# Altium PCB PX4FLOW2.0_X0.PcbDoc (part 1 of 2)
Units mm, origin at the board's own origin, x right, y up, seen from the top; angles counter-clockwise.
Board outline 45.39 x 35 mm, 6 copper layers (Top, Signal Layer 1, Signal Layer 2, Route2, Route15, Bottom), stack 1.474 mm thick; 104 components, 102 nets, 463 pads, 304 vias.
Unrouted connection lines stored in the file: 8.
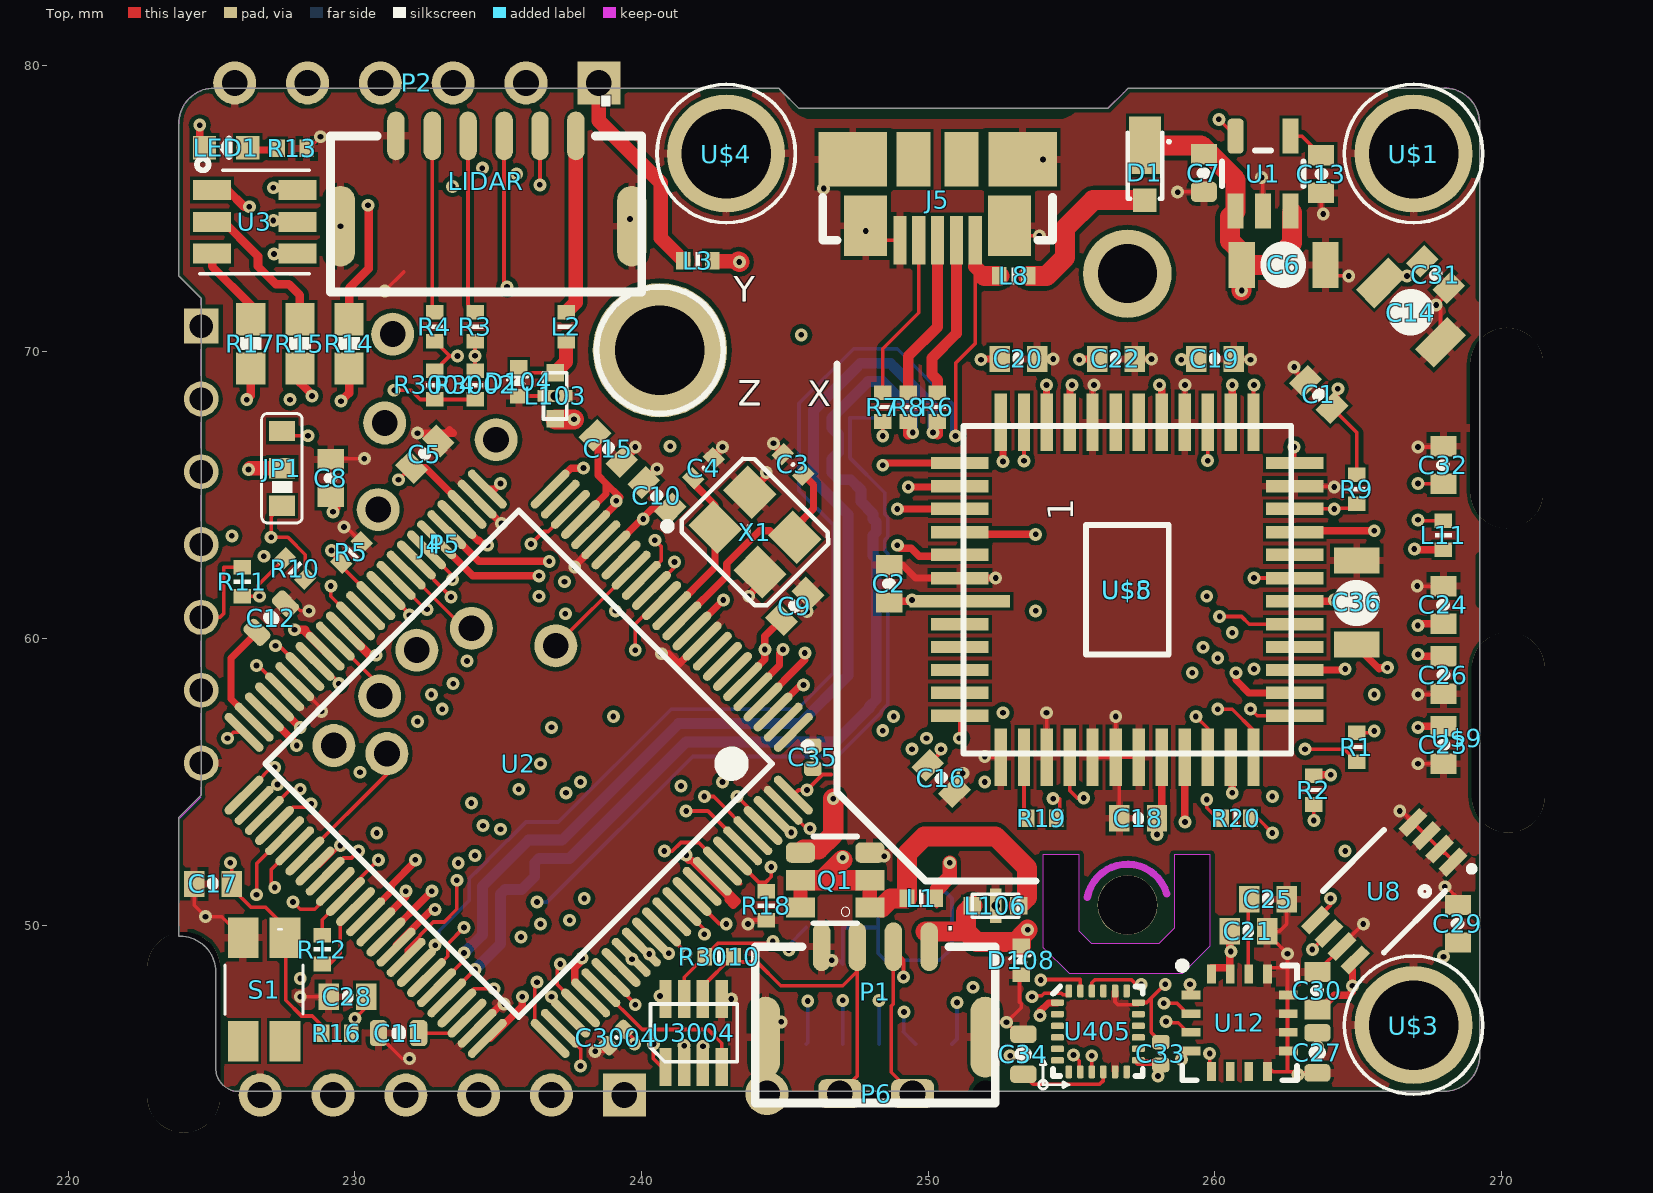
[diagram p0: Top view]
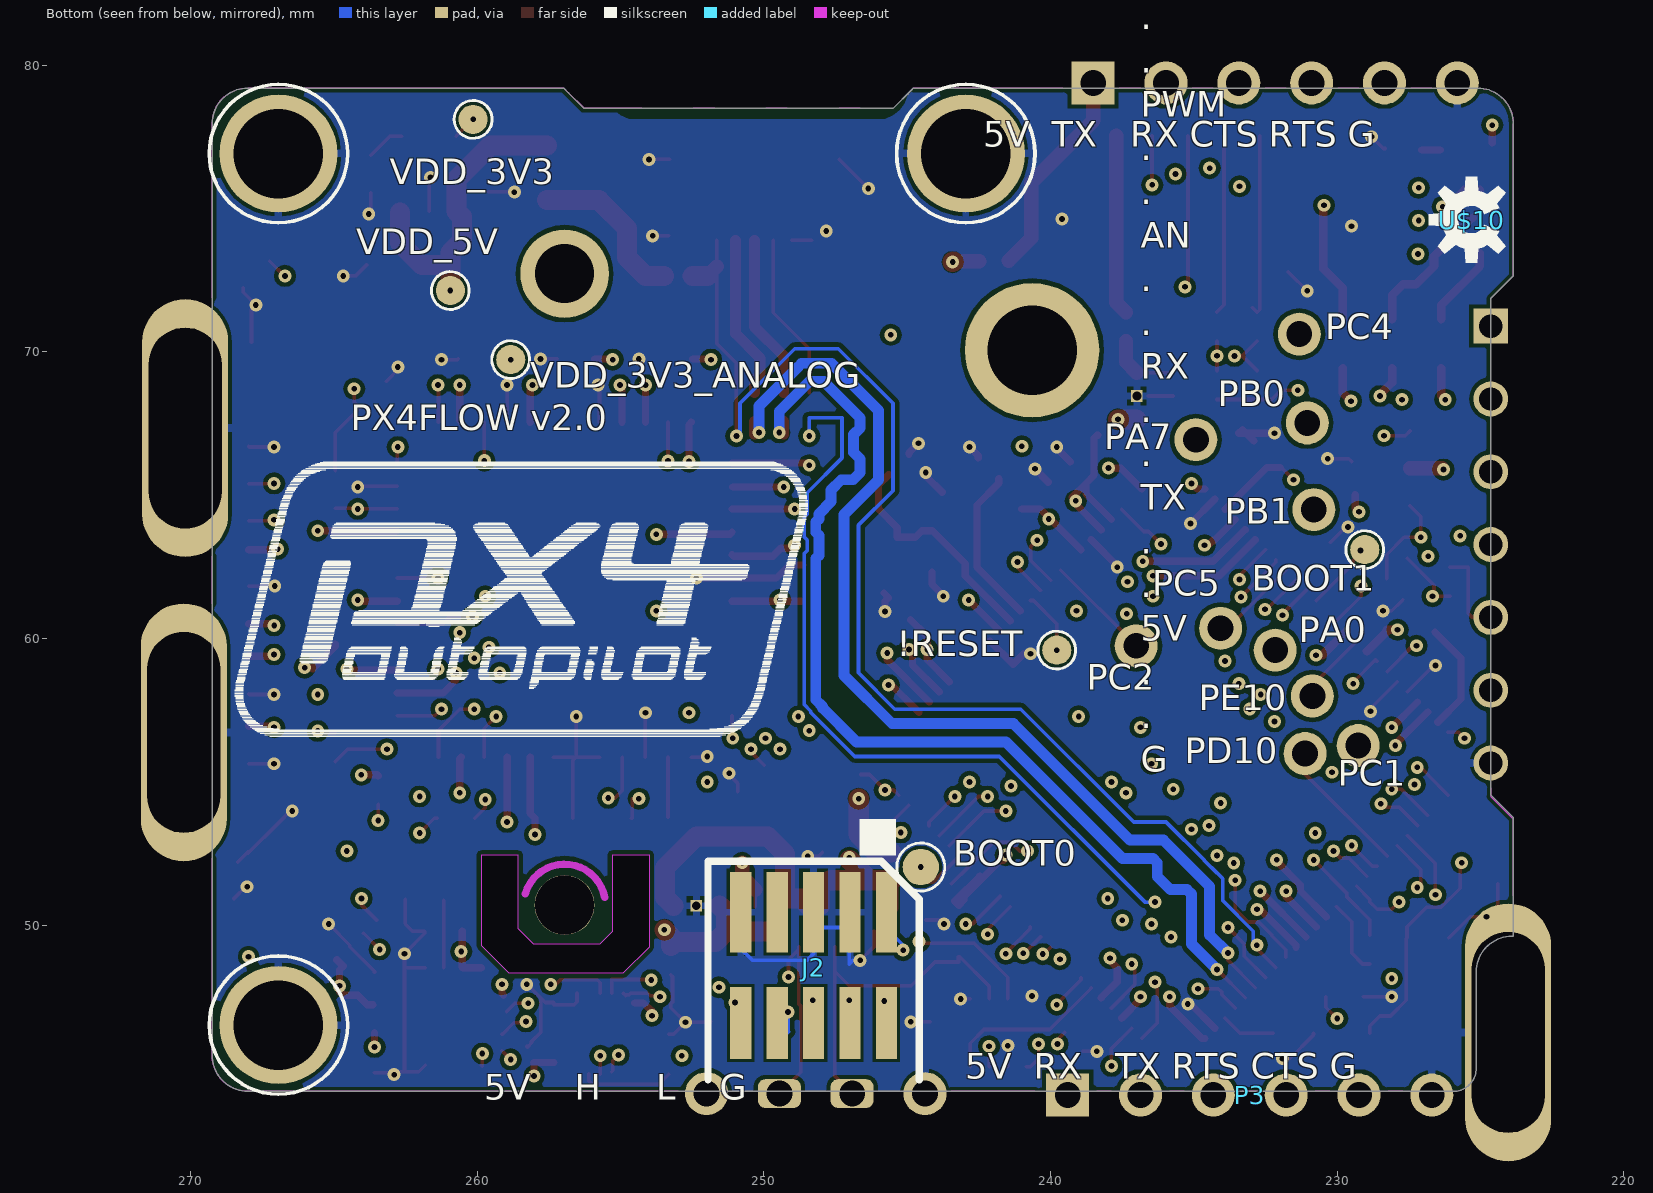
[diagram p1: Bottom view, seen from below]
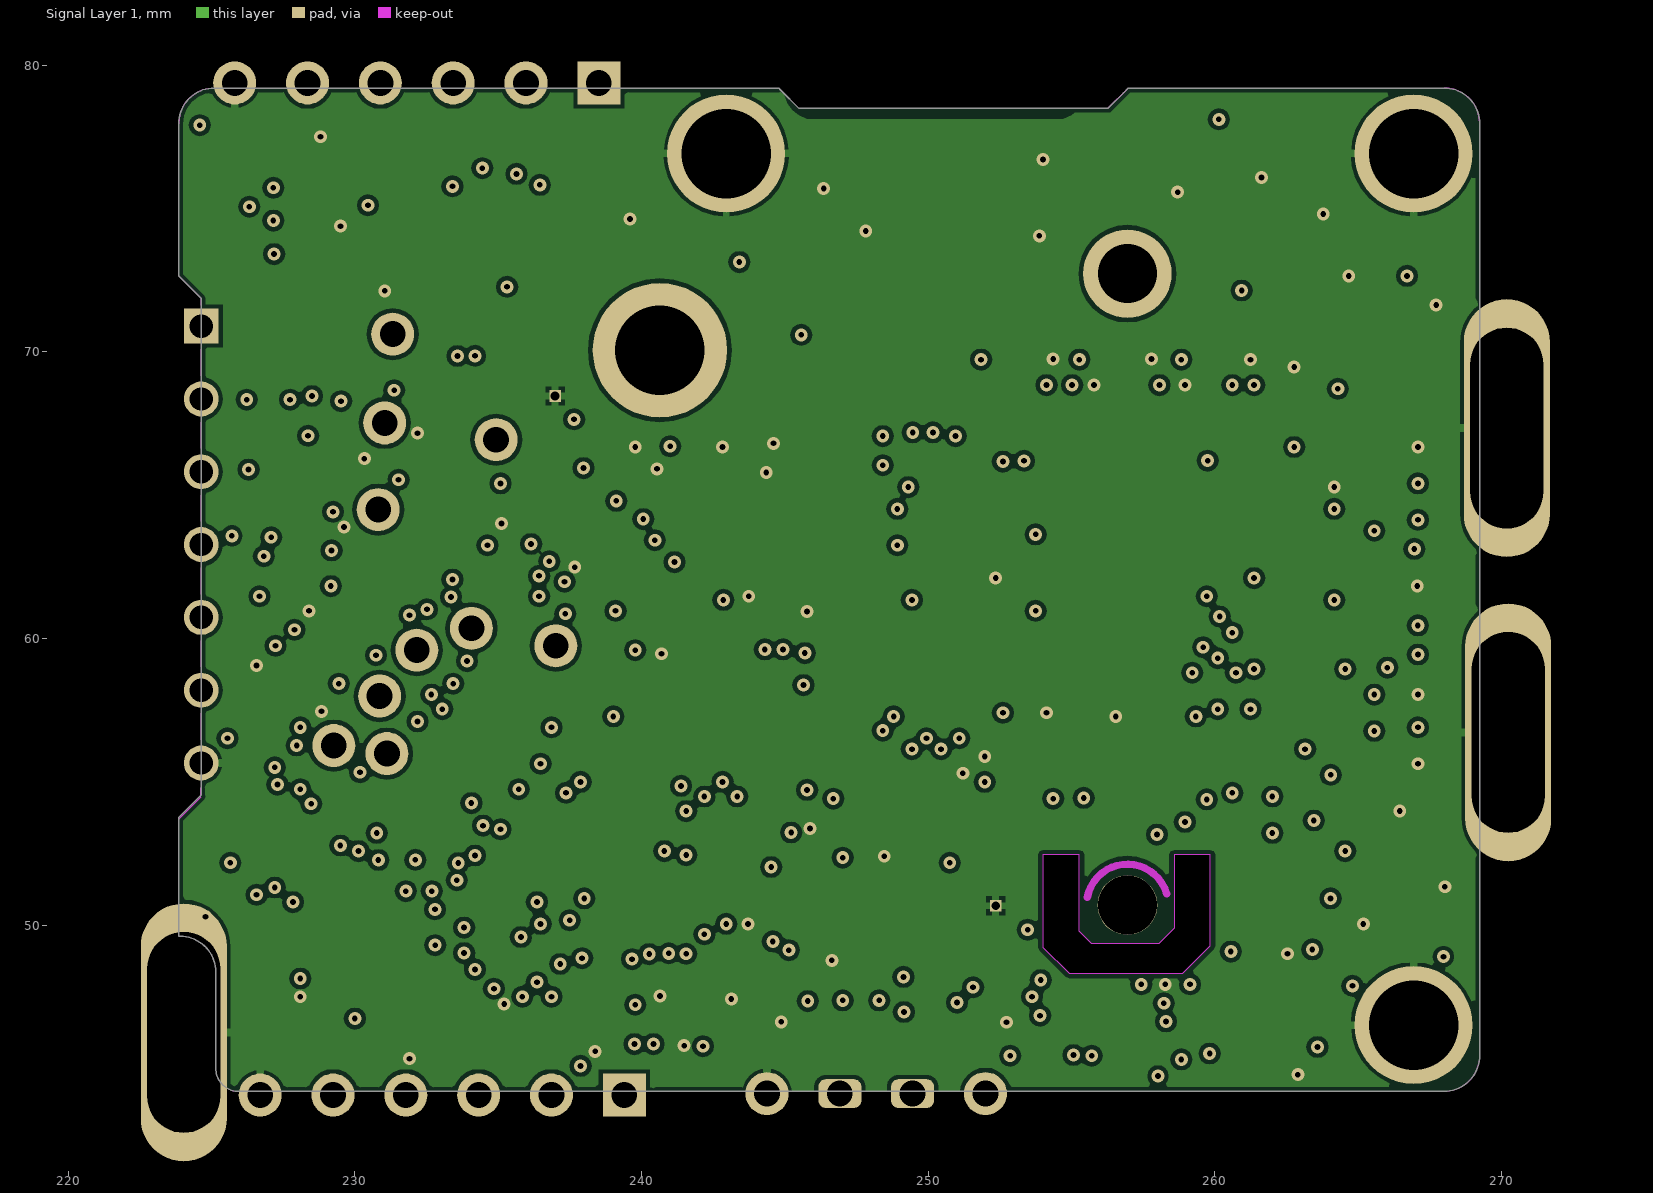
[diagram p2: Signal Layer 1]
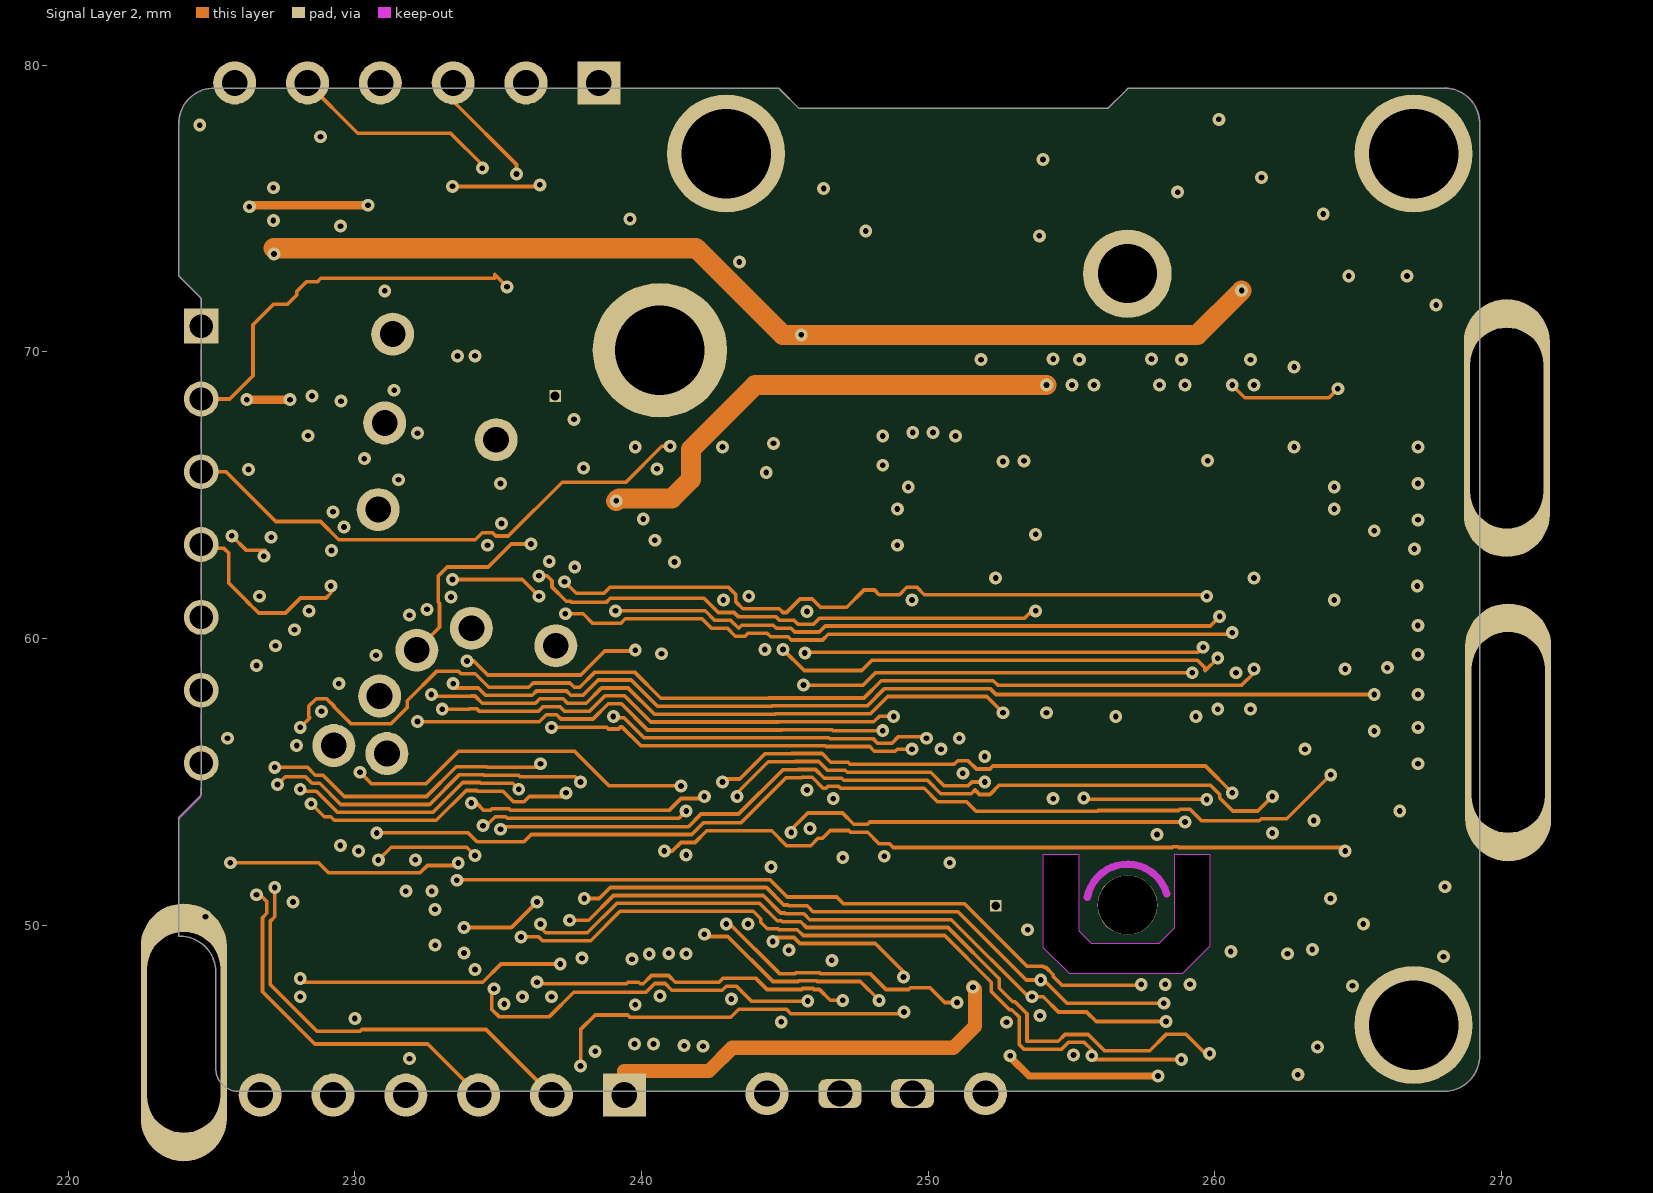
[diagram p3: Signal Layer 2]
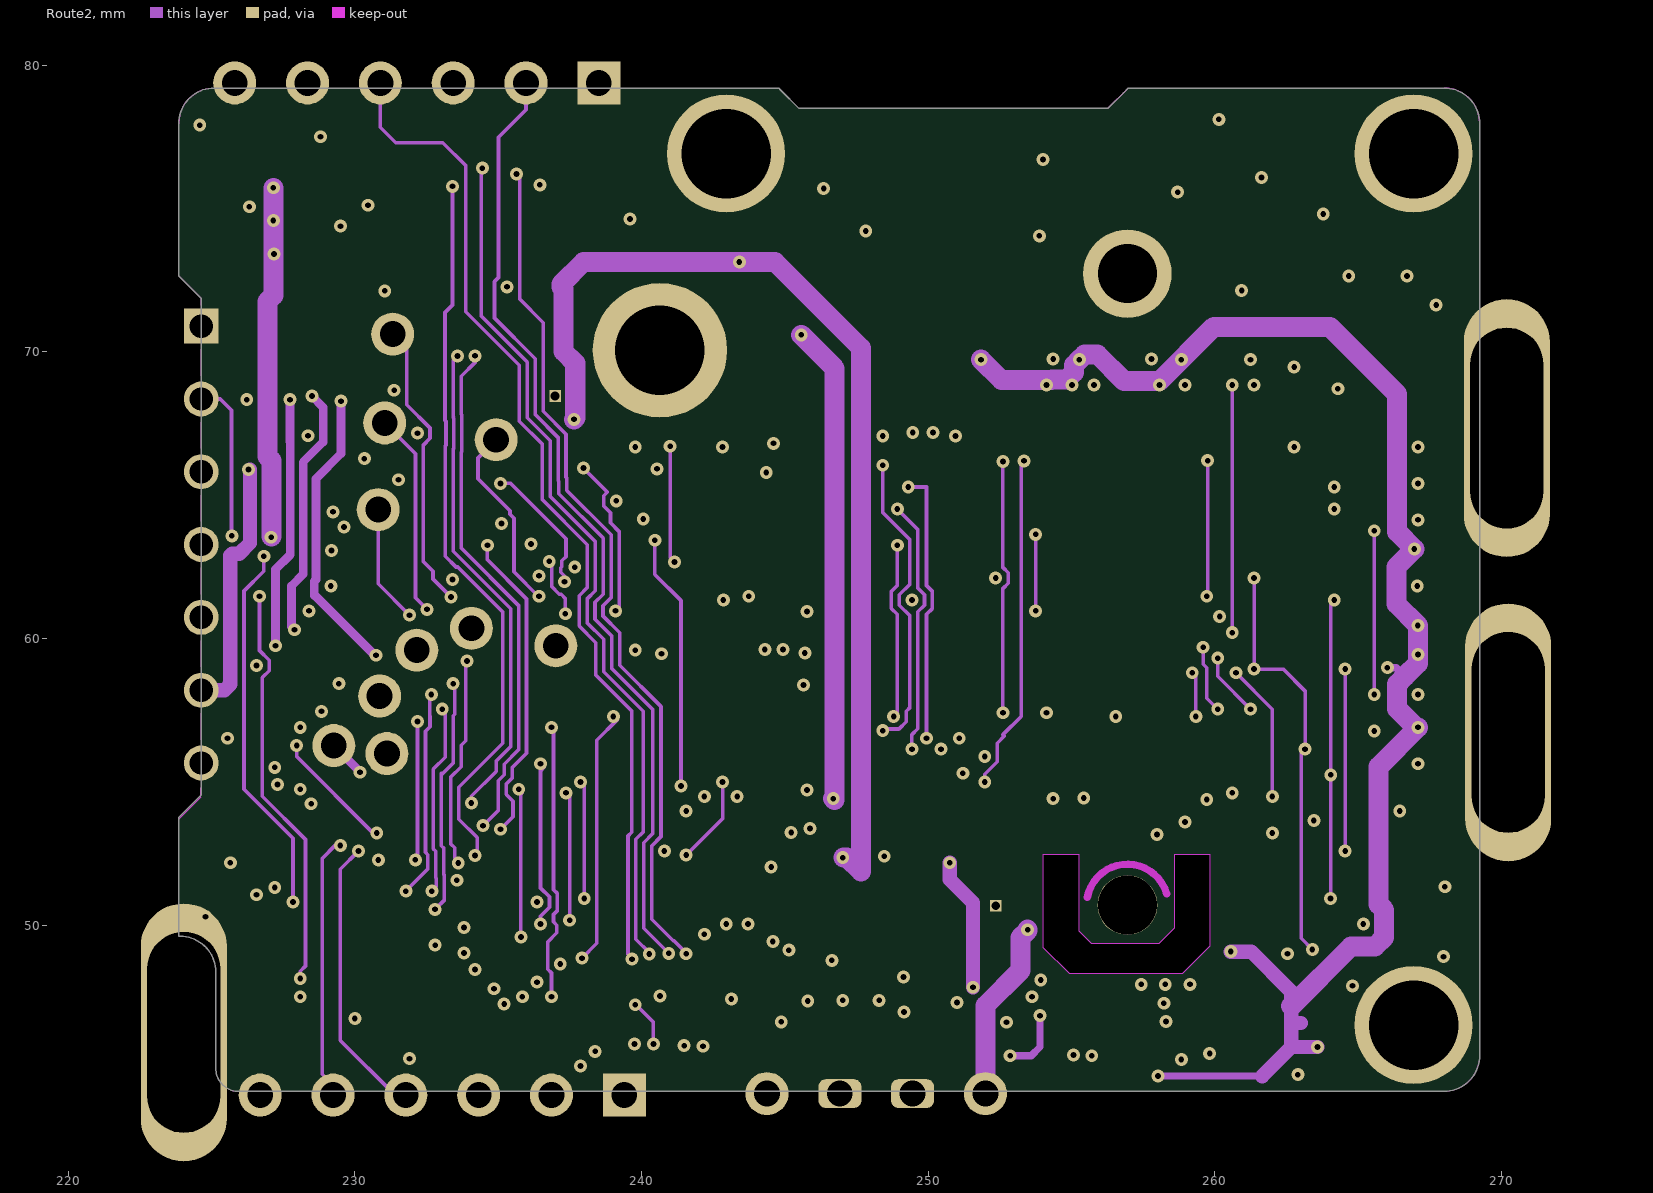
[diagram p4: Route2]
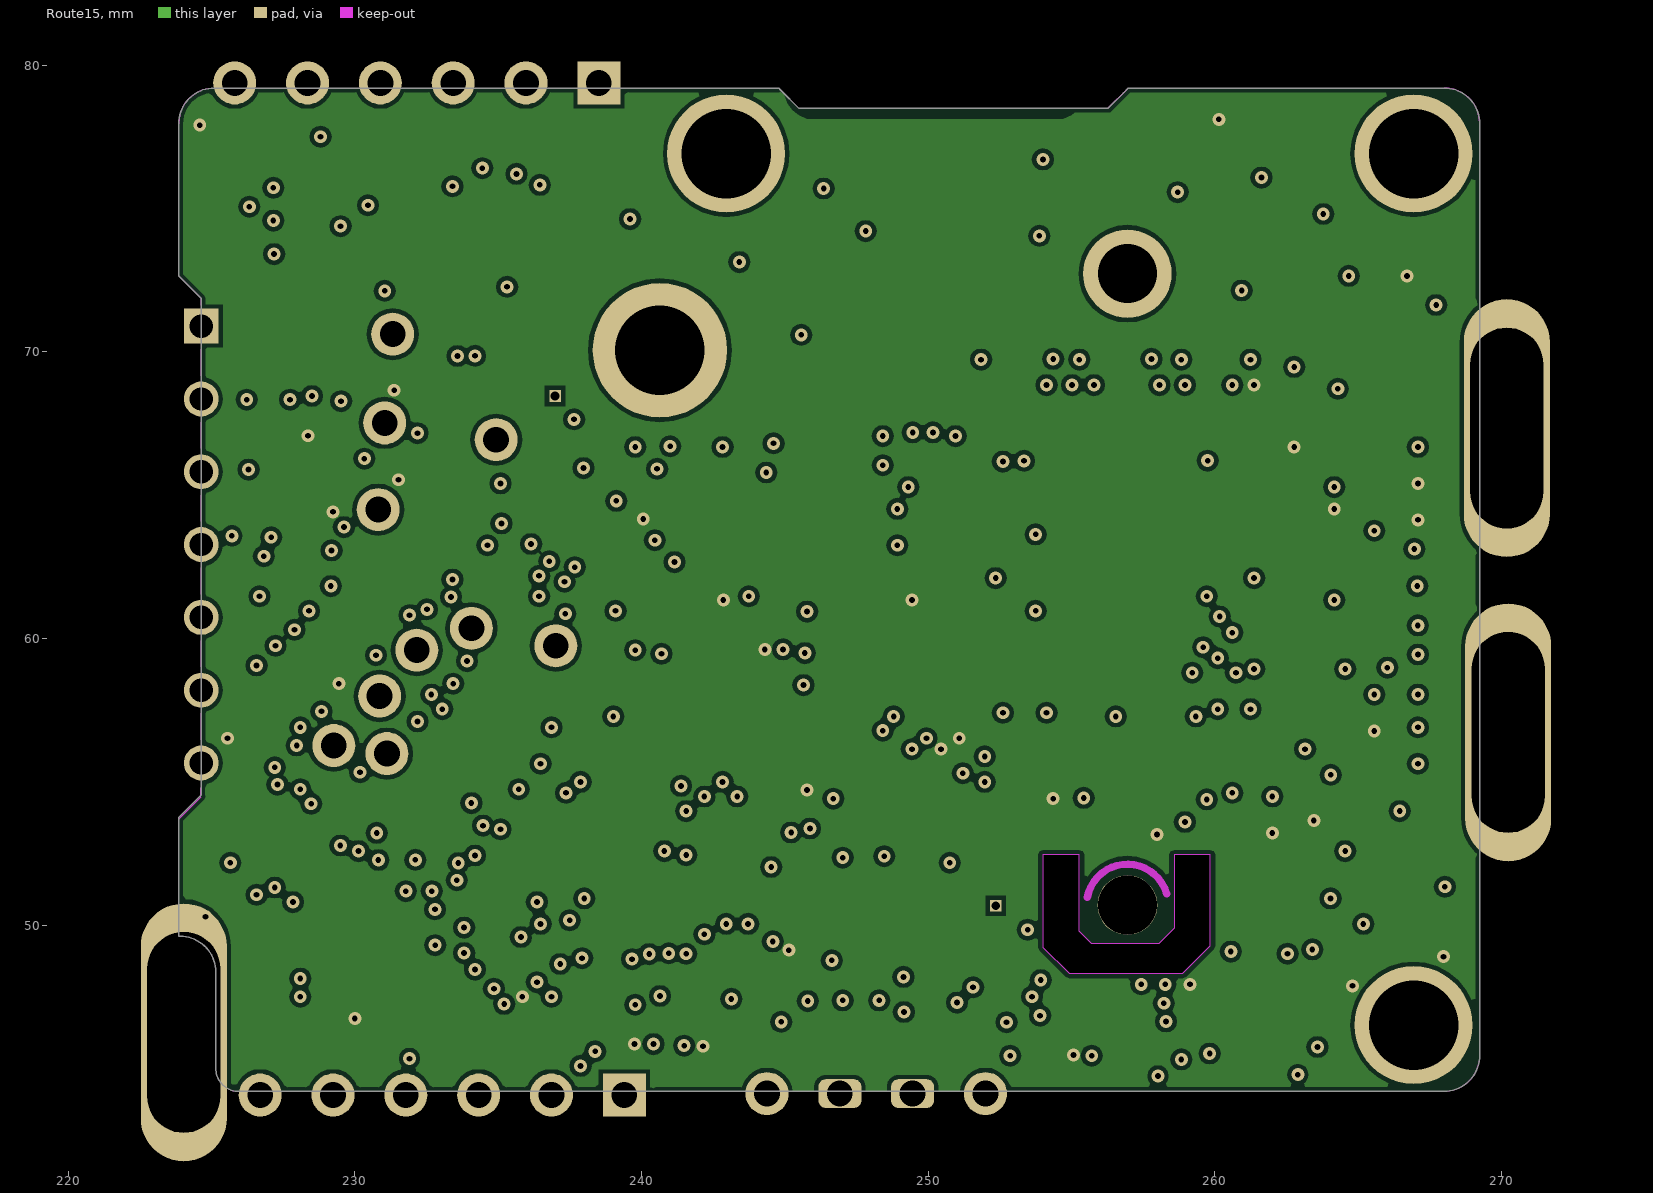
[diagram p5: Route15]

## Layer stack, top to bottom
Top Solder: solder mask 0.0102, Solder Resist, Dk 3.5
Top: signal copper 0.035
Dielectric 1: core 0.5, FR-4, Dk 4.8
Signal Layer 1: signal copper 0.036
Dielectric 5: prepreg 0.127, Dk 4.2
Signal Layer 2: signal copper 0.036
Dielectric 4: core 0.254, Dk 4.2
Route2: signal copper 0.035
Dielectric 2: prepreg 0.127, FR-4, Dk 4.2
Route15: signal copper 0.035
Dielectric 3: core 0.254, FR-4, Dk 4.2
Bottom: signal copper 0.035
Bottom Solder: solder mask 0.0102, Solder Resist, Dk 3.5

## Board outline
223.85,49.606 223.901,49.606 cw(c223.901,48.362) 225.146,48.362 225.146,45.009 ccw(c225.946,44.996) 225.933,44.196 267.995,44.196 ccw(c267.983,45.453) 269.24,45.466 269.24,77.953 ccw(c267.995,77.953) 267.995,79.197 256.975,79.197 256.805,79.027 256.264,78.486 245.491,78.486 244.856,79.121 244.78,79.197 225.095,79.197 ccw(c225.095,77.953) 223.85,77.953 223.85,72.644 224.638,71.857 224.638,54.534 223.85,53.746
cut-out: 254,52.451 254,49.225 254.914,48.311 258.877,48.311 259.842,49.276 259.842,52.451 258.572,52.451 258.572,49.886 258.039,49.352 255.702,49.352 255.27,49.784 255.27,52.451

## Design rules (kind name [scope] priority, off if disabled: settings)
Clearance [All] p1: gap=0.15 except(0.1: Track-SMDPad SMDPad-SMDPad SMDPad-THPad SMDPad-Via SMDPad-Fill SMDPad-Poly)
ComponentClearance [All] p1 off: gap=0.254 collisioncheckmode=3 verticalgap=0.254 showdistances=FALSE
DiffPairsRouting [All] p1: maxlimit=0.254 minlimit=0.254 mostfreqgap=0.254 toplayer_minwidth=0.381 toplayer_maxwidth=0.381 toplayer_prefwidth=0.381 midlayer1_minwidth=0.381 midlayer1_maxwidth=0.381 midlayer1_prefwidth=0.381 midlayer2_minwidth=0.381 midlayer2_maxwidth=0.381 midlayer2_prefwidth=0.381 midlayer3_minwidth=0.381 midlayer3_maxwidth=0.381 midlayer3_prefwidth=0.381 midlayer14_minwidth=0.381 midlayer14_maxwidth=0.381 midlayer14_prefwidth=0.381 bottomlayer_minwidth=0.381 bottomlayer_maxwidth=0.381 bottomlayer_prefwidth=0.381 maxuncoupledlength=12.7
HoleSize [All] p1: absolutevalues=TRUE maxlimit=9 minlimit=0.2 maxpercent=80.000 minpercent=20.000
HoleToHoleClearance mdViaViaSameLayer [All] p1: gap=0.203 allowstackedmicrovias=TRUE
HoleToHoleClearance [All] p2: gap=0.254 allowstackedmicrovias=TRUE
MinimumSolderMaskSliver [All] p1 off: minsoldermaskwidth=0.254
PasteMaskExpansion mlMinCreamFrame [All] p1: expansion=-0.102
PasteMaskExpansion [All] p2: expansion=0
PolygonConnect edge [All vs InNet('GND')] p1 off: connectstyle=Direct reliefconductorwidth=0.254 reliefentries=4 polygonreliefangle="90 Angle" airgapwidth=0.254
PolygonConnect ThermalVias [IsVia] p2: connectstyle=Direct reliefconductorwidth=0.254 reliefentries=4 polygonreliefangle="90 Angle" airgapwidth=0.254
PolygonConnect [All] p3: connectstyle=Relief reliefconductorwidth=0.254 reliefentries=4 polygonreliefangle="90 Angle" airgapwidth=0.127
RoutingVias [All] p1: holewidth=0.2 width=0.45 viastyle="Through Hole" minholewidth=0.2 minwidth=0.45 maxholewidth=0.711 maxwidth=1.27
SilkToBoardRegionClearance [All] p1 off:
SilkToSilkClearance [All] p1 off: silktosilkclearance=0.254
SilkToSolderMaskClearance [IsPad] p1 off: minsilkscreentomaskgap=0.254 clearancetoexposedcopper=TRUE
SolderMaskExpansion mlMinStopFrame [All] p1: expansion=0.025
SolderMaskExpansion [All] p2: expansion=0.102
Width Width_3V3_Analogue [InNet('VDD_3V3_ANALOG')] p1: maxlimit=0.7 minlimit=0.254 preferedwidth=0.7
Width [All] p2: maxlimit=3 minlimit=0.127 preferedwidth=0.127
21 further rules are at their usual default settings.

## Classes and differential pairs
component class PX4FLOW2.0_CPU_X0: !RESET BOOT0 BOOT1 C3 C4 C11 C12 C17 C30 R1 R2 R3 R4 R5 R12 R16 R18 R3002 R3004 S1 U2 U8 U$9 U$10 VDD_3V3 VDD_3V3_ANALOG VDD_5V X1
component class PX4FLOW2.0_Connectors_X0: D1 D104 D108 J2 J4 J5 L1 L2 L3 L8 L103 L106 LIDAR P1 P2 P3 P5 P6 R6 R7 R8 R10 R11
component class PX4FLOW2.0_Power_X0: C5 C6 C7 C8 C9 C10 C13 C14 C15 C23 C24 C26 C28 C29 C31 C32 C35 C36 JP1 L11 LED1 Q1 R13 R14 R15 R17 U1 U3
component class PX4FLOW2.0_CAM_X0: C1 C2 C16 C18 C19 C20 C22 R9 R19 R20 U$5 U$8
component class PX4FLOW2.0_Sensors_CAN_X0: C21 C25 C27 C33 C34 C3004 R3010 U12 U405 U3004 U$1 U$3 U$4
differential pair OTG_FS: +OTG_FS_P -OTG_FS_N
differential pair OTG: +OTG_P -OTG_N

## Components (designator, comment, footprint, x,y, rotation, side; value= is the part's Value field where it differs from the comment)
!RESET "PAD.04" PAD.04X.04#1 239.776,59.588 r90 bottom
BOOT0 "PAD.05" PAD.05X.05 244.519,52.023 r90 bottom
BOOT1 "PAD.04" PAD.04X.04#2 229.032,63.094 r90 bottom
C1 "0u1" 0402-CAP#1 263.627,68.504 r135.01 top
C2 "0u1" 0402-CAP#1 248.641,61.9 r90 top
C3 "8p" 0402-CAP#2 245.288,66.065 r135.01 top
C4 "8p" 0402-CAP#2 242.164,65.938 r225 top
C5 "0u1" 0402-CAP#1 232.435,66.421 r45.01 top
C6 "100u" 1206-CAP 262.382,73.025 r0 top
C7 "0u1" 0402-CAP#3 259.613,76.225 r90 top
C8 "0u1" 0402-CAP#1 229.159,65.583 r90 top
C9 "0u1" 0402-CAP#1 245.339,61.112 r45.01 top
C10 "0u1" 0402-CAP#1 240.538,64.973 r135.01 top
C11 "2u2" 0603-CAP 231.521,46.228 r180 top
C12 "2u2" 0603-CAP 227.076,60.706 r45 top
C13 "470p" 0402-CAP#1 263.703,76.2 r270.01 top
C14 "100u" 1206-CAP 266.827,71.374 r315 top
C15 "0u1" 0402-CAP#1 238.836,66.624 r315.02 top
C16 "0u1" 0402-CAP#1 250.444,55.118 r315.02 top
C17 "0u1" 0402-CAP#1 225.044,51.435 r0.01 top
C18 "0u1" 0402-CAP#1 257.327,53.721 r180.02 top
C19 "0u1" 0402-CAP#1 259.994,69.748 r0 top
C20 "0u1" 0402-CAP#1 253.136,69.748 r0 top
C21 "0u1" 0402-CAP#1 261.163,49.784 r0 top
C22 "0u1" 0402-CAP#1 256.54,69.748 r0 top
C23 "0u1" 0402-CAP#1 267.97,56.286 r270.01 top
C24 "0u01" 0402-CAP#1 267.97,61.163 r90 top
C25 "0u01" 0402-CAP#1 261.849,50.902 r0 top
C26 "0u001" 0402-CAP#1 267.97,58.725 r270.01 top
C27 "2u2" 0603-CAP 263.576,45.542 r270 top
C28 "0u1" 0402-CAP#1 229.743,47.498 r180.02 top
C29 "0u1" 0402-CAP#1 268.478,50.038 r90.01 top
C30 "0u1" 0402-CAP#1 263.576,47.701 r90 top
C31 "0u1" 0402-CAP#1 267.691,72.695 r315.02 top
C32 "0u1" 0402-CAP#1 267.97,66.04 r90 top
C33 "0u1" 0402-CAP#4 258.115,45.517 r90 top
C34 "2u2" 0603-CAP 253.314,45.491 r90 top
C35 "0u1" 0402-CAP#5 245.974,55.855 r90 top
C36 "100u" 1206-CAP 264.947,61.239 r90 top
C3004 "0u1" 0402-CAP#4 239.116,46.076 r225 top
D1 "MSS1P4-M3" MICROSMP 257.556,75.946 r270 top
D104 "DIODE-TVS" 0402-TVS 235.712,68.961 r270 top
D108 "DIODE-TVS" 0402-TVS 253.238,48.768 r270 top
J2 "" FTSH-105-01-XXX-DV-K 248.26,48.412 r0 bottom
J4 "MB1040" MAXSONAR 224.638,70.891 r90 top
J5 "47346-0001" MOLEX-47346-0001 250.317,76.708 r270 top
JP1 "JUMPER-30603" SJ_3_0603_PASTE1&2 227.457,65.278 r90 top
L1 "Inductor" L0402 249.758,50.927 r0 top
L2 "Inductor" L0402 237.363,70.866 r90 top
L3 "Inductor" L0402 241.96,73.177 r180 top
L8 "FERRITE BEAD 120 OHM 0402" L0402 252.984,72.644 r180.01 top
L11 "Inductor" L0402 267.97,63.602 r270.01 top
L103 "Kyocera KNH16C104DA5TS EMI filter" KYOCERA-KNH16-DA 236.982,68.453 r90 top
L106 "Kyocera KNH16C104DA5TS EMI filter" KYOCERA-KNH16-DA 252.349,50.673 r180 top
LED1 "GREEN" LED-0603 225.501,77.114 r270 top
LIDAR "CLICKMATE_1.25_6" CLICKMATE_V6 234.579,72.078 r180 top
P1 "CLICKMATE_1.25_4" CLICKMATE_V4 248.158,43.79 r180 top
P2 "Header 6" HDR1X6 238.506,79.375 r180 top
P3 "Header 6" HDR1X6 239.395,44.069 r180 bottom
P5 "Header 10" HDR1X10 217.983,48.209 r90 top
P6 "Header 4" HDR1X4 251.993,44.12 r180 top
Q1 "NTGS4111P" TSOP-6 246.761,51.562 r90.01 top
R1 "1k5" R0402 264.947,56.21 r270.01 top
R2 "1k5" R0402 263.449,54.712 r270.01 top
R3 "100" R0402 234.188,70.866 r90 top
R4 "100" R0402 232.791,70.866 r90 top
R5 "10K" R0402 229.87,62.992 r45 top
R6 "22R" R0402 250.317,68.072 r270 top
R7 "10k" R0402 248.412,68.072 r270 top
R8 "22R" R0402 249.301,68.072 r270 top
R9 "10k" R0402 264.947,65.202 r270.01 top
R10 "1k" R0402 227.914,62.433 r135 top
R11 "0R" R0402 226.06,61.976 r270 top
R12 "470" R0402 228.854,49.149 r270 top
R13 "270R" R0402 227.813,77.089 r180.01 top
R14 "68R" 0603-RES 229.794,70.282 r270 top
R15 "5R6" 0603-RES 228.079,70.282 r270 top
R16 "10K" R0402 229.362,46.228 r0 top
R17 "5R6" 0603-RES 226.365,70.282 r270 top
R18 "10K" R0402 244.348,50.673 r90 top
R19 "1k" R0402 253.949,53.721 r0 top
R20 "1k" R0402 260.731,53.721 r0 top
R3002 "1K5" R0402 234.188,68.834 r90 top
R3004 "1K5" R0402 232.791,68.834 r90 top
R3010 "120R" R0402 242.697,48.895 r0 top
S1 "RESET" EVQP7J01K 226.822,47.752 r270.01 top
U1 "V_REG_LDOSMD" SOT23-5 261.671,76.2 r0 top
U2 "STM32F427VIT7TR" STM-LQFP100_N 235.712,55.626 r225 top
U3 "LRTB GFTG-T7AW-1+V7A7-29+R5T9-49-L" 6-PLCC 226.492,74.524 r0 top
U8 "128KB EEPROM" MSOP-8 265.913,51.181 r135.01 top
U12 "L3GD20" L3GD20 260.858,46.584 r0 top
U405 "MPU-9250" MPU-6500 255.905,46.279 r0 top
U3004 "3.3-V CAN TRANSCEIVER" SOT23-8 241.808,46.228 r0 top
U$1 "MOUNT-HOLE3.1MM" MOUNT-HOLE3.1 266.929,76.911 r90 top
U$3 "MOUNT-HOLE3.1MM" MOUNT-HOLE3.1 266.929,46.507 r90 top
U$4 "MOUNT-HOLE3.1MM" MOUNT-HOLE3.1 242.951,76.911 r90 top
U$5 "MT9V034" CLCC-48 256.946,61.697 r90 top
U$8 "LENSMOUNT_M12" LENSMOUNT_LARGE_M12 256.946,61.697 r90 top
U$9 "PX4-LOGO-20MM" PX4-LOGO-20MM 268.453,56.54 r0 top
U$10 "OSHW-LOGOS" OSHW-LOGO-S 225.298,74.6 r90 bottom
VDD_3V3 "PAD.04" PAD.04X.04#2 260.137,78.105 r90 bottom
VDD_3V3_ANALOG "PAD.04" PAD.04X.04#2 258.826,69.723 r90 bottom
VDD_5V "PAD.04" PAD.04X.04#2 260.932,72.134 r90 bottom
X1 "Crystal Oscillator in 3.2x2.5 SMD" OSCILLATOR-3.2X2.5 243.942,63.703 r315.02 top

## Footprints (in the part's own frame and the unit in brackets; to place one, negate y for a bottom-side part, rotate by r counter-clockwise, add the part's x,y. Pads: shape width x height; smd on the part's side, far side on the other; paste and mask are expansions set on the pad)
6-PLCC [mil]
  rect 52x28 smd: A1(59,44) A2(59,0) A3(59,-43.31) C1(-58.07,44) C2(-58.07,0) C3(-58.07,-43.31)
  silkscreen extent -79,-71 75,87
0402-CAP#1 [mil] "0402-CAP"
  rect 28x36 smd: 1(-25.59,0) 2(26,0)
  silkscreen extent 0,-1 0,2
0402-CAP#2 [mil] "0402-CAP"
  rect 20x24 smd: P$1(-19.69,0) P$2(20,0)
  silkscreen extent 0,0 0,1
0402-CAP#3 [mil] "0402-CAP"
  rrect50% 28x36 smd: 1(-25.59,0)
  rect 28x36 smd: 2(26,0)
  silkscreen extent 0,-1 0,2
0402-CAP#4 [mil]
  rrect50% 20x24 smd mask+0: P$1(-15.75,0) P$2(15.75,0)
  silkscreen extent 0,0 0,1, body extent -20,-10 20,10, height 20
0402-CAP#5 [mil]
  rrect50% 20x24 smd mask+0: 1(-15.75,0) 2(15.75,0)
  silkscreen extent 0,0 0,1, body extent -20,-10 20,10, height 20
0402-TVS [mil] "0402-TVS"
  rect 20x24 smd: A(20,0) C(-19.68,0)
  silkscreen extent -10,-16 3,16, body extent -20,-10 20,10, height 20
0603-CAP [mil] "0603-CAP"
  rrect50% 24x36 smd mask+0: P$1(-27.56,0) P$2(27.56,0)
  silkscreen extent 0,-2 0,2, body extent -31,-16 31,16, height 34
0603-RES [mil] "0603-RES"
  rect 44x40 smd: 1(-33.46,0) 2(34,0)
  silkscreen extent -9,-15 9,15, body extent -31,-16 31,16, height 34
1206-CAP [mil]
  rect 36x63 smd: P$1(-57.09,0) P$2(58,0)
  silkscreen extent 0,0 0,1
CLCC-48 [mil] "CLCC-48"
  rect 17x138 smd: 1(-15.75,230)
  rect 17x79 smd: 2(-47.24,230) 3(-78.74,230) 4(-110.24,230) 5(-141.73,230) 6(-173.23,230) 19(-173.23,-229.92) 20(-141.73,-229.92) 21(-110.24,-229.92) 22(-78.74,-229.92) 23(-47.24,-229.92) 24(-15.75,-229.92) 25(16,-229.92) 26(48,-229.92) 27(79,-229.92) 28(111,-229.92) 29(142,-229.92) 30(174,-229.92) 43(174,230) 44(142,230) 45(111,230) 46(79,230) 47(48,230) 48(16,230)
  rect 79x17 smd: 7(-229.92,174) 8(-229.92,142) 9(-229.92,111) 10(-229.92,79) 11(-229.92,48) 12(-229.92,16) 13(-229.92,-15.75) 14(-229.92,-47.24) 15(-229.92,-78.74) 16(-229.92,-110.24) 17(-229.92,-141.73) 18(-229.92,-173.23) 31(230,-173.23) 32(230,-141.73) 33(230,-110.24) 34(230,-78.74) 35(230,-47.24) 36(230,-15.75) 37(230,16) 38(230,48) 39(230,79) 40(230,111) 41(230,142) 42(230,174)
  silkscreen extent -225,-225 225,225
CLICKMATE_V4 [mil] "5023820470"
  rrect100% 24x67 smd: 1(-73.82,-214.57) 2(-24.61,-214.57) 3(25,-214.57) 4(74,-214.57)
  rrect100% 40x111 smd: GND(-150.59,-90.55) GND(151,-90.55)
  silkscreen extent -164,-215 165,0, body extent -164,-237 164,-3, height 179
CLICKMATE_V6 [mil]
  rrect100% 24x67 smd: 1(-123.03,-214.57) 2(-73.82,-214.57) 3(-24.61,-214.57) 4(25,-214.57) 5(74,-214.57) 6(124,-214.57)
  rrect100% 40x111 smd: GND(-199.8,-90.55) GND(200,-90.55)
  silkscreen extent -214,-215 214,0, body extent -214,-237 214,-3, height 179
EVQP7J01K [mil]
  rect 56x42 smd: A1(-70.87,29) A2(71,29) B3(-70.87,-28.54) B4(71,-28.54)
  silkscreen extent -83,-53 34,54, body extent -93,-83 93,57
FTSH-105-01-XXX-DV-K [mil]
  rect 29x110 smd: 1(-100,-80) 3(-50,-80) 5(0,-80) 7(50,-80) 9(100,-80)
  rect 29x98.43 smd: 2(-100,72.14) 4(-50,72.14) 6(0,72.14) 8(50,72.14) 10(100,72.14)
  silkscreen extent -145,-208 145,150
HDR1X4 [mm] "Connector; Header; 4 Position"
  round 0 / inner round 1.5 / far side round 1.5 hole 0.9: 1(0,0)
  rrect50% 1.5x1 hole 0.9: 2(2.54,0) 3(5.08,0)
  round 1.5 hole 0.9: 4(7.62,0)
HDR1X6 [mm] "Connector; Header; 6 Position"
  rect 1.5x1.5 hole 0.9: 1(0,0)
  round 1.5 hole 0.9: 2(2.54,0) 3(5.08,0) 4(7.62,0) 5(10.16,0) 6(12.7,0)
HDR1X10 [mm] "Connector; Header; 10 Position"
  round 1.5 hole 0.9: 1(19.304,-13.056) 2(16.281,-12.827) 3(7.772,-13.132) 4(18.72,-16.942) 5(22.403,-13.335) 6(12.141,-16.078) 7(11.379,-14.173) 8(9.779,-12.878) 9(8.052,-11.278) 10(11.532,-19.025)
KYOCERA-KNH16-DA [mil] "KYOCERA-KNH16-DA"
  rect 16x16 smd: GND(0,16) GND(0,-15.75)
  rect 16x16 hole 12: GND(0,0)
  rect 24x24 smd: P$1(-31.5,0) P$2(32,0)
  silkscreen extent -31,-16 32,16, body extent -20,-10 20,10, height 14
L3GD20 [mm] "4x4x1"
  rect 0.66x0.305 smd mask+0: 1(-1.7,0.975) 2(-1.7,0.325) 3(-1.7,-0.325) 4(-1.7,-0.975) 9(1.7,-0.975) 10(1.7,-0.325) 11(1.7,0.325) 12(1.7,0.975)
  rect 0.305x0.66 smd mask+0: 5(-0.975,-1.7) 6(-0.325,-1.7) 7(0.325,-1.7) 8(0.975,-1.7) 13(0.975,1.7) 14(0.325,1.7) 15(-0.325,1.7) 16(-0.975,1.7)
  silkscreen extent -2.13,-2 2,2.13, body extent -2,-2 2,2, height 0.98
L0402 [mil]
  rect 20x24 smd: 1(-19.68,0) 2(20,0)
  silkscreen extent -3,-12 3,12
LED-0603 [mil] "LED-0603"
  rect 32x32 smd: A(0,-29.53) C(0,30)
  silkscreen extent -12,-4 12,4
LENSMOUNT_LARGE_M12 [mil] "LENSMOUNT_LARGE_M12"
  round 82.13 hole 81 unplated: P$1(-433.07,0)
  round 121.5 hole 81: P$2(434,0)
  body extent -514,-400 514,400, height 906
MAXSONAR [mil] "MAXSONAR"
  round 48 hole 32: AN(-200,0) GND(-600,0) PW(-100,0) RX(-300,0) TX(-400,0) VDD(-500,0)
  rect 48x48 hole 32: BW(0,0)
  round 184.5 hole 123: P$1(-33.07,-629.92)
  silkscreen extent -120,-717 54,-543
MICROSMP [mil] "MICROSMP"
  rect 32x32 smd: ANODE(26,0)
  rect 79x44 smd: CATHODE(-49.21,0)
  silkscreen extent -67,-24 24,35
MOLEX-47346-0001 [mil]
  rect 67x18 smd: D+(111,0) D-(111,26) GND(111,-51.18) ID(111,-25.59) VBUS(111,52)
  rect 75x94 smd: GND1(0,117) GND4(0,-116.14)
  rect 83x59 smd: GND2(91,99) GND3(91,-98.43)
  rect 75x47 smd: GND5(0,-32.97) GND6(0,33)
  silkscreen extent 52,-157 111,158, body extent -94,-157 120,157, height 107
MOUNT-HOLE3.1 [mil] "MOUNT-HOLE3.1"
  round 162 hole 123: 1(0,0)
  silkscreen extent -95,-95 95,95
MPU-6500 [mil]
  rrect50% 18x9 smd: 1(-55.12,40) 2(-55.12,24) 3(-55.12,8) 4(-55.12,-7.87) 5(-55.12,-23.62) 6(-55.12,-39.37) 13(56,-39.37) 14(56,-23.62) 15(56,-7.87) 16(56,8) 17(56,24) 18(56,40)
  rrect50% 9x18 smd: 7(-39.37,-55.12) 8(-23.62,-55.12) 9(-7.87,-55.12) 10(8,-55.12) 11(24,-55.12) 12(40,-55.12) 19(40,56) 20(24,56) 21(8,56) 22(-7.87,56) 23(-23.62,56) 24(-39.37,56)
  silkscreen extent -81,-79 62,62, body extent -60,-60 60,60, height 39
MSOP-8 [mil] "MSOP-8"
  rect 16x41 smd: 1(-38.39,-94.49) 2(-12.8,-94.49) 3(13,-94.49) 4(39,-94.49) 5(39,95) 6(13,95) 7(-12.8,95) 8(-38.39,95)
  silkscreen extent -67,-110 60,60
OSCILLATOR-3.2X2.5 [mil] "OSCILLATOR-3.2X2.5"
  rect 56x48 smd: 1(-43.31,-33.46) 2(44,-33.46) 3(44,34) 4(-43.31,34)
  silkscreen extent -95,-83 83,71
OSHW-LOGO-S [mm]
  silkscreen extent -1.49,-1.18 1.5,1.5
PAD.04X.04#1 [mil]
  rrect100% 40x40 smd paste-78.74: P1(0,0)
  silkscreen extent -26,-26 26,26
PAD.04X.04#2 [mil]
  rrect100% 40x40 smd paste-78.74: P$1(0,0)
  silkscreen extent -26,-26 26,26
PAD.05X.05 [mm]
  rrect100% 1.27x1.27 smd: P$1(0,0)
  silkscreen extent -0.84,-0.84 0.84,0.84
PX4-LOGO-20MM [mm]
R0402 [mil]
  rect 20x24 smd: 1(-19.69,0) 2(20,0)
  silkscreen extent -3,-12 3,12, body extent -20,-10 20,10, height 12
SJ_3_0603_PASTE1&2 [mil] "SJ_3_0603_PASTE1&2"
  rect 28x36 smd: 1(-25.59,0) 2(26,0) 3(77,0)
  silkscreen extent -49,-28 101,28
SOT23-5 [mil] "SOT23-5"
  rect 22x48 smd: 1(-37.4,-51.18) 2(0,-51.19) 3(38,-51.19) 4(38,52)
  rrect50% 22x48 smd: 5(-37.4,52)
  silkscreen extent -56,-17 56,32
SOT23-8 [mil] "SOT23-8"
  rect 17x52 smd: 1(-38.39,-46.26) 2(-12.8,-46.26) 3(13,-46.26) 4(39,-46.26) 5(39,47) 6(13,47) 7(-12.8,47) 8(-38.39,47)
  silkscreen extent -59,-39 60,40, body extent -59,-55 59,55, height 44
STM-LQFP100_N [mm] "Thin QFP, 100-Leads, Body 14x14mm, Pitch 0.5mm, IPC Medium Density"
  oval 1.8x0.3 smd: 1(-7.55,6) 2(-7.55,5.5) 3(-7.55,5) 4(-7.55,4.5) 5(-7.55,4) 6(-7.55,3.5) 7(-7.55,3) 8(-7.55,2.5) 9(-7.55,2) 10(-7.55,1.5) 11(-7.55,1) 12(-7.55,0.5) 13(-7.55,0) 14(-7.55,-0.5) 15(-7.55,-1) 16(-7.55,-1.5) 17(-7.55,-2) 18(-7.55,-2.5) 19(-7.55,-3) 20(-7.55,-3.5) 21(-7.55,-4) 22(-7.55,-4.5) 23(-7.55,-5) 24(-7.55,-5.5) 25(-7.55,-6) 51(7.55,-6) 52(7.55,-5.5) 53(7.55,-5) 54(7.55,-4.5) 55(7.55,-4) 56(7.55,-3.5) 57(7.55,-3) 58(7.55,-2.5) 59(7.55,-2) 60(7.55,-1.5) 61(7.55,-1) 62(7.55,-0.5) 63(7.55,0) 64(7.55,0.5) 65(7.55,1) 66(7.55,1.5) 67(7.55,2) 68(7.55,2.5) 69(7.55,3) 70(7.55,3.5) 71(7.55,4) 72(7.55,4.5) 73(7.55,5) 74(7.55,5.5) 75(7.55,6)
  oval 0.3x1.8 smd: 26(-6,-7.55) 27(-5.5,-7.55) 28(-5,-7.55) 29(-4.5,-7.55) 30(-4,-7.55) 31(-3.5,-7.55) 32(-3,-7.55) 33(-2.5,-7.55) 34(-2,-7.55) 35(-1.5,-7.55) 36(-1,-7.55) 37(-0.5,-7.55) 38(0,-7.55) 39(0.5,-7.55) 40(1,-7.55) 41(1.5,-7.55) 42(2,-7.55) 43(2.5,-7.55) 44(3,-7.55) 45(3.5,-7.55) 46(4,-7.55) 47(4.5,-7.55) 48(5,-7.55) 49(5.5,-7.55) 50(6,-7.55) 76(6,7.55) 77(5.5,7.55) 78(5,7.55) 79(4.5,7.55) 80(4,7.55) 81(3.5,7.55) 82(3,7.55) 83(2.5,7.55) 84(2,7.55) 85(1.5,7.55) 86(1,7.55) 87(0.5,7.55) 88(0,7.55) 89(-0.5,7.55) 90(-1,7.55) 91(-1.5,7.55) 92(-2,7.55) 93(-2.5,7.55) 94(-3,7.55) 95(-3.5,7.55) 96(-4,7.55) 97(-4.5,7.55) 98(-5,7.55) 99(-5.5,7.55) 100(-6,7.55)
  silkscreen extent -7.67,-6.25 6.25,6.82, body extent -7,-7 7,7, height 1.6
TSOP-6 [mil] "TSOP-6"
  rect 28x40 smd: 1(-37.4,-47.24) 2(0,-47.24) 5(0,48) 6(-37.4,48)
  rrect50% 28x40 smd: 3(38,-47.24) 4(38,48)
  silkscreen extent -59,-30 60,30

## Part data
BOOT0: "Test pad This footprint includes three classes: The actual test pads, a pogo-pin footprint to mount the pogo-pin as through-hole part and a hole footprint which allows the head of the pogo-pin to pass through (do NOT use the hole to mount the pogo-pin). In a typical test setup, the stack would consist of three PCBs: The actual PCB under testing with a test pad on the bottom, then a second PCB with the hole for the pogo-pin head where the PCB under testing is pressed on and a third PCB at 30 mm / 1.2\" distance with the pogo-pin footprints. The pogo-pins are soldered to the last PCB. To create the stack, copy the board under testing and exchange the footprints - this way the correct positioning is ensured."
C1 C2 C5 C7 C8 C9 C10 C13 C15 C16 C17 C18 C19 C20 C21 C22 C23 C24 C25 C26 C28 C29 C30 C31 C32: library part CAP0402-CAP, "CapacitorStandard 0603 ceramic capacitor, and 0.1\" leaded capacitor."
C3 C4: library part CAP0402, "CAP CER 8PF 50V C0G 0402"
C6 C14 C36: library part CAP1206, "CAP CER 100UF 10V 20% X5R 1206"
C11 C12: library part CAP0603, "Capacitor, 2.2uF, 16V, 10%, X6S, 0603, Ceramic"
C27 C34: library part CAPACITOR-0603, "Capacitor, 2.2uF, 16V, 10%, X6S, 0603, Ceramic"
C33: library part CAPACITOR-0402, "Capacitor, 0.1uF, 16V, Y5V, 0402, Ceramic"
C35: library part CAP0402-CAP, "0402"
C3004: library part CAP0402, "CAP CER 0.1UF 16V Y5V 0402"
D1: library part DIODE-SCHOTTKY_MSMP, "Schottky barrier diode in DO214AC, e.g. Fairchild SS14."
D104 D108: "Diode, TVS, 14VWM, 40VC, 0402, SMD"
J2: library part ARM_MINI_JTAG-SMT
J4: library part MAXSONAR
J5: library part MOLEX-47346-0001, "MICRO USB B, BOTTOM MOUNT"
L1 L2 L3 L11: "FERRITE BEAD 120 OHM 0402"
L8: library part Inductor
L103 L106: library part KNH16C104DA5TS, "Capacitor, Filter, 0.1uF, 25V, 2A, 0603, SMD"
LED1: library part LED0603, "Green LED"
LIDAR: "1.25 W/B SGL R/A REC ASSY 6CKT"
P1: "Connector, Rcpt, 4Pos, 1.25MM, W/B, VERT, SMD, Tin"
P2 P3: "Header, 6-Pin"
P5: "Header, 10-Pin"
P6: "Header, 4-Pin"
R1 R2 R3002 R3004: library part RESISTOR0402-RES, "RES 1.5K OHM 1/16W 1% 0402 SMD"
R3 R4 R6 R8 R9 R10 R11 R12 R13 R19 R20: library part RESISTOR0402-RES, "ResistorBasic schematic elements and footprints for 0603, 1206, and PTH 1/10th watt (small) resistors."
R5 R7 R16 R18: library part RESISTOR0402-RES, "RES 10K OHM 1/16W 1% 0402 SMD"
R14: library part RESISTOR0402-RES, "RES SMD 68 OHM 1% 1/4W 0603"
R15 R17: library part RESISTOR0402-RES, "RES SMD 5.6 OHM 1% 1/5W 0603"
R3010: library part RESISTOR0402-RES, "RES 120 OHM 1/16W 1% 0402 SMD"
S1: library part SWITCH-MOMENTARY-2, "Switch"
U1: "Voltage Regulator LDOStandard 150mA LDO voltage regulator in SOT-23 layout. Micrel part MIC5205. BP (by-pass) pin is used to lower output noise with 470pF cap."
U2: "ARM Cortex-M4 32-bit MCU+FPU, 210 DMIPS, 2048 kB Flash, 256 kB Internal RAM, 82 I/Os, 100-pin LQFP, -40 to 105 degC, Tape and Reel"
U3: library part RGB-LED6-PLCC, "RGB LED with separate anode/cathode terminals"
U8: library part EEPROM-I2CMSOP, "I2C EEPROM Generic footprint for I2C EEPROMS. Compatible types include:    Microchip 24FC128-I/MS    Microchip 24AA256-I/MS    ST Microelectronics M24128-BWDW6TP"
U12: "Sensor, Low-power, Three-axis, Angular rate"
U405: library part MPU-6500
U3004: library part MAX3051MAX3051EKA, "IC TXRX CAN 1MBPS SOT23-8"
U$8: "Point Grey compatible M12 lens mount"
U$10: "Open Source Hardware Logo This logo indicates the piece of hardware it is found on incorporates a OSHW license and/or adheres to the definition of open source hardware found here: http://freedomdefined.org/OSHW"
X1: library part OSCILLATOR-3.2X2.5, "CRYSTAL 24MHZ 8PF SMD"

## Free pads (board coordinates)
  oval 2.54x7 / inner oval 3x9 / far side oval 3x9 hole 2.54 slot 7 at 90 deg: 2(224.028,46.253) 2(270.18,67.335) 2(270.231,56.718)

## Via types
v1: diameter 0.45, hole 0.2, Top to Bottom, tented both sides, 304 vias

## Nets (pads, with @x,y where several pads share a name; then routed paths per layer and width w, separated by ;. In a path a pad name is that pad's centre, name@x,y a point inside that pad or via, vN(x,y) a via of type N, cw(c..) or ccw(c..) an arc to the next point about the centre after c; other vN are vias at no path point)
ADC12_IN4: P5.5 U2.33 | length 12
  Top w0.127: U2.33@232.141,62.732 232.141,62.651 v1(233.35,61.443)
  Route2 w0.127: P5.5@231.318,70.612 231.807,70.123 231.807,68.152 232.62,67.339 232.62,66.976 232.387,66.743 232.387,62.674 232.722,62.34 232.722,62.071 v1(233.35,61.443)
ADC12_IN5: P5.6 U2.34 | length 3
  Top w0.127: U2.34@231.788,62.379 P5.6@233.939,60.228
ADC123_IN10: J4.AN U2.15 | length 24.2
  Top w0.127: U2.15@240.344,61.672 241.148,62.476 v1(241.148,62.662)
  Route2 w0.127: v1(240.995,66.7) 240.995,62.814 v1(241.148,62.662)
  Signal Layer 2 w0.127: J4.AN@224.638,65.811 225.501,65.811 227.235,64.077 228.799,64.077 229.434,63.442 234.196,63.442 234.438,63.685 234.801,63.685 234.916,63.569 235.35,63.569 237.229,65.449 239.453,65.449 240.705,66.7 v1(240.995,66.7)
ADC123_IN11: P5.9 U2.16 | length 24.4
  Top w0.127: U2.16@239.99,62.025 240.69,62.726 240.69,63.195 v1(240.462,63.424)
  Route2 w0.127: v1(240.462,63.424) 240.462,62.23 241.375,61.317 v1(241.375,54.852)
  Route2 w0.3: P5.9@229.26,56.261 230.177,55.344 v1(230.177,55.328)
  Signal Layer 2 w0.127: v1(230.177,55.328) 230.574,54.932 232.478,54.932 233.611,56.065 237.661,56.065 238.874,54.852 v1(241.375,54.852)
ADC123_IN12: P5.10 U2.17 | length 3.7
  Top w0.127: P5.10@237.007,59.741 237.007,59.75 U2.17@239.636,62.379
ADC123_IN13: U2.18
BLUE_LED: R17.2 U2.44 | length 12.9
  Top w0.127: v1(227.228,59.741) 227.305,59.741 227.33,59.765 U2.44@228.252,58.843
  Top w0.3: v1(226.224,68.327) 226.365,68.468 R17.2@226.365,69.418
  Route2 w0.3: v1(227.228,59.741) 227.228,62.408 227.739,62.919 227.739,66.859 227.735,66.863 v1(227.735,68.327)
  Signal Layer 2 w0.3: v1(226.224,68.327) v1(227.735,68.327)
BOOT0: BOOT0.P$1 R18.2 U2.94 | length 2.2
  Top w0.127: U2.94@243.172,52.409 244.094,51.487 244.323,51.487 244.519,51.682 v1(244.519,52.023)
CAM_NRESET: C1.1 R9.1 U2.30 U$5.32 | length 47.4
  Top w0.127: v1(264.287,68.707) 264.287,68.245 C1.1@264.086,68.044 264.947,67.183 R9.1@264.947,65.852
  Top w0.254: U2.30@233.202,63.793 233.208,63.793 234.314,62.687 v1(236.779,62.687) ; U$5.32@260.546,67.539 260.604,67.596 v1(260.604,68.834)
  Route2 w0.127: v1(236.779,62.687) 236.862,62.604 236.862,61.806 237.131,61.537 237.192,61.537 237.338,61.392 v1(237.338,60.858) ; v1(260.604,60.198) v1(260.604,68.834)
  Signal Layer 2 w0.127: v1(237.338,60.858) 237.96,60.858 238.297,60.521 239.272,60.521 239.433,60.683 242.105,60.683 242.439,60.349 242.993,60.349 243.27,60.072 243.605,60.072 243.712,60.179 244.374,60.179 244.501,60.052 245.114,60.052 245.224,59.942 246.309,59.942 246.507,60.14 260.546,60.14 v1(260.604,60.198) ; v1(260.604,68.834) 261.043,68.395 263.975,68.395 v1(264.287,68.707)
CAN1_RX: U2.81 U3004.4 | length 5.9
  Top w0.127: U2.81@238.576,47.812 238.576,47.799 240.019,46.355 242.316,46.355 242.799,45.872 U3004.4@242.799,45.053
CAN1_TX: U2.82 U3004.1 | length 4
  Top w0.127: U2.82@238.929,48.166 238.929,48.091 239.776,47.244 v1(239.776,47.219) ; v1(240.411,45.847) 240.411,45.339 240.697,45.053 U3004.1@240.833,45.053
  Route2 w0.127: v1(239.776,47.219) 239.801,47.219 240.411,46.609 v1(240.411,45.847)
CAN_H_1: P1.2 P6.2 R3010.1 U3004.7 | length 16
  Top w0.127: U3004.7@241.483,47.422 241.483,48.181 R3010.1@242.197,48.895 242.665,49.363 v1@244.435,49.363 ; P1.2@248.783,49.24 P1.2@248.783,49.138 ; v1(249.133,48.189) 249.133,48.788 P1.2@248.783,49.138 ; P6.2@249.453,44.12 248.71,44.863 248.71,47.176 248.783,47.249 P1.2@248.783,49.138
  Signal Layer 2 w0.127: v1(244.577,49.428) 244.71,49.562 245.317,49.562 245.522,49.357 248.146,49.357 249.133,48.37 v1(249.133,48.189)
CAN_L_1: P1.3 P6.3 R3010.2 U3004.6 | length 12.4
  Top w0.127: U3004.6@242.138,47.422 242.138,47.869 243.164,48.895 R3010.2@243.205,48.895 243.205,48.71 244.025,48.71 244.856,47.879 247.015,47.879 247.523,48.387 ; P6.3@246.913,44.12 247.523,44.729 247.523,48.387 ; P1.3@247.523,49.24 247.523,48.387
DCMI_D0: U2.63 U$5.43 | length 38.1
  Top w0.254: U2.63@230.373,50.287 231.273,51.187 231.273,51.389 232.105,52.221 v1(232.105,52.273) ; v1(248.412,66.04) 248.488,66.116 U$5.43@251.104,66.116
  Route2 w0.127: v1(232.105,52.273) 232.181,52.349 v1(232.181,57.099) ; v1(248.412,56.78) 248.55,56.78 248.61,56.84 248.611,56.838 248.975,56.838 249.232,57.095 249.232,57.459 249.23,57.46 249.359,57.589 249.359,60.79 248.989,61.159 248.989,61.523 249.359,61.892 249.359,63.442 248.412,64.389 v1(248.412,66.04)
  Signal Layer 2 w0.127: v1(232.181,57.099) 232.093,57.099 232.087,57.092 236.431,57.092 236.673,57.335 237.037,57.335 237.186,57.185 238.302,57.185 238.832,57.716 239.295,57.716 240.206,56.804 244.892,56.804 244.9,56.812 246.64,56.812 246.673,56.78 v1(248.412,56.78)
DCMI_D1: U2.64 U$5.42 | length 40.7
  Top w0.254: U2.64@230.727,49.934 231.775,50.982 v1(231.775,51.181) ; U$5.42@252.527,67.539 252.603,67.462 v1(252.603,66.167)
  Route2 w0.127: v1(231.775,51.181) 231.775,51.188 232.544,51.956 232.544,52.455 232.458,52.54 232.458,56.756 232.62,56.918 232.62,57.281 232.606,57.294 232.606,57.981 v1(232.664,58.039) ; v1(252.603,57.404) 252.603,61.737 252.788,61.921 252.788,62.285 252.603,62.469 v1(252.603,66.167)
  Signal Layer 2 w0.127: v1(232.664,58.039) 232.606,57.981 234.05,57.981 234.059,57.99 234.19,57.99 234.441,57.739 236.294,57.739 236.444,57.888 237.266,57.888 237.416,57.739 238.072,57.739 238.603,58.269 239.524,58.269 240.436,57.358 244.663,57.358 244.671,57.366 247.986,57.366 248.59,57.97 252.037,57.97 v1(252.603,57.404)
DCMI_D2: U2.97 U$5.41 | length 24.2
  Top w0.127: v1(243.332,54.483) 244.233,53.582 U2.97@244.233,53.469 ; v1(253.34,66.192) U$5.41@253.34,67.539
  Route2 w0.127: v1(251.968,54.991) 251.968,55.26 252.407,55.698 252.407,56.344 252.654,56.591 252.603,56.642 253.238,57.277 253.238,66.091 v1(253.34,66.192)
  Signal Layer 2 w0.127: v1(243.332,54.483) 243.332,54.61 244.418,55.696 245.351,55.696 245.359,55.704 246.182,55.704 246.486,55.399 247.096,55.399 247.17,55.326 250.084,55.326 250.548,54.862 251.02,54.862 251.024,54.857 251.388,54.857 251.521,54.991 251.943,54.991 251.968,54.966 v1(251.968,54.991)
DCMI_D3: U2.98 U$5.15 | length 16.5
  Top w0.254: v1@258.946,53.594 U$5.15@258.946,55.857
  Signal Layer 2 w0.127: v1(245.217,53.228) 245.217,53.33 245.792,53.906 247.01,53.906 247.403,53.512 247.885,53.512 247.967,53.594 251.651,53.594 v1(258.953,53.594)
DCMI_D4: U2.3 U$5.16 | length 18.5
  Top w0.127: v1(259.334,57.277) 259.746,56.865 U$5.16@259.746,55.857
  Top w0.254: U2.3@244.586,57.429 244.586,57.42 245.643,58.477 v1(245.643,58.369)
  Route2 w0.127: v1(259.207,58.801) 259.334,58.674 v1(259.334,57.277)
  Signal Layer 2 w0.127: v1(245.643,58.369) 247.726,58.369 248.158,58.801 v1(259.207,58.801)
DCMI_D5: U2.92 U$5.17 | length 27.2
  Top w0.254: v1(241.554,52.44) 241.554,52.336 241.635,52.255 241.737,52.255 243.019,50.974 243.019,50.871 243.198,50.691 243.332,50.825 242.456,51.702 U2.92@242.465,51.702 ; U$5.17@260.546,55.857 260.604,55.799 v1(260.604,54.61)
  Route2 w0.127: v1(241.554,52.44) 242.824,53.71 v1(242.824,54.991)
  Signal Layer 2 w0.127: v1(242.824,54.991) 242.928,55.095 243.425,55.095 244.303,55.973 245.236,55.973 245.245,55.981 246.296,55.981 246.601,55.676 247.211,55.676 247.284,55.602 250.893,55.602 251.024,55.734 251.388,55.734 251.68,55.441 252.15,55.441 252.253,55.545 259.669,55.545 v1(260.604,54.61)
DCMI_D6: U2.4 U$5.18 | length 20.9
  Top w0.127: v1(260.096,57.531) 260.604,57.531 261.346,56.789 U$5.18@261.346,55.857
  Top w0.254: U2.4@244.233,57.783 244.223,57.783 245.694,59.254
  Route2 w0.127: v1(259.588,59.69) 259.588,59.098 259.715,58.971 259.715,57.912 v1(260.096,57.531)
  Signal Layer 2 w0.127: v1(245.694,59.487) 245.724,59.517 259.415,59.517 v1(259.588,59.69)
DCMI_D7: U2.5 U$5.19 | length 21.8
  Top w0.127: v1(261.239,57.531) 261.473,57.297 U$5.19@262.786,57.297
  Top w0.254: U2.5@243.879,58.136 243.88,58.135 244.81,59.064 244.81,59.492 v1(244.932,59.614)
  Route2 w0.127: v1(260.096,59.309) 260.096,58.674 v1(261.239,57.531)
  Signal Layer 2 w0.127: v1(244.932,59.614) 245.669,58.877 247.675,58.877 248.038,59.24 259.389,59.24 259.646,58.983 259.646,58.896 259.664,58.877 v1(260.096,59.309)
DCMI_D8: U2.78 U$5.45 | length 34.9
  Top w0.254: v1(236.855,47.498) 236.855,47.412 U2.78@237.515,46.752 ; v1(248.92,64.516) U$5.45@251.104,64.516
  Route2 w0.127: v1(236.855,47.498) 236.855,48.326 236.721,48.459 236.721,49.411 237.04,49.729 237.04,49.995 236.924,50.11 236.924,50.366 237.063,50.504 237.063,51.096 236.924,51.234 236.924,56.827 v1(236.855,56.896) ; v1(248.92,64.516) 249.636,63.8 249.636,61.754 249.867,61.523 249.867,61.159 249.636,60.928 249.636,56.85 249.428,56.642 v1(249.428,56.134)
  Signal Layer 2 w0.127: v1(236.855,56.896) 238.775,56.896 238.832,56.838 239.196,56.838 239.265,56.908 239.319,56.908 239.977,56.25 245.122,56.25 245.13,56.258 246.411,56.258 246.443,56.226 247.954,56.226 248.116,56.064 248.846,56.064 248.916,56.134 v1(249.428,56.134)
DCMI_D9: U2.80 U$5.44 | length 33.5
  Top w0.254: v1(237.922,48.844) 237.922,48.752 237.668,48.499 237.668,48.022 238.222,47.468 U2.80@238.222,47.459 ; v1(249.301,65.278) U$5.44@251.079,65.278
  Route2 w0.127: v1(237.922,48.844) 238.437,49.359 238.437,56.446 239.141,57.15 v1(239.014,57.277) ; v1(249.301,65.278) 249.936,65.278 249.936,61.845 250.144,61.637 250.144,61.045 249.936,60.837 v1(249.936,56.515)
  Signal Layer 2 w0.127: v1(239.014,57.277) 239.059,57.232 239.387,57.232 240.091,56.527 245.007,56.527 245.015,56.535 246.526,56.535 246.558,56.503 248.069,56.503 248.23,56.341 248.497,56.341 248.732,56.342 248.963,56.573 249.878,56.573 v1(249.936,56.515)
DCMI_HSYNC: U2.29 U$5.20 | length 48.9
  Top w0.254: U2.29@233.555,64.147 234.304,63.398 234.329,63.424 234.507,63.246 v1(234.62,63.246) ; v1(260.731,58.801) 260.731,58.547 261.181,58.097 U$5.20@262.786,58.097
  Route2 w0.127: v1(234.62,63.246) 234.62,62.738 235.985,61.373 235.985,55.996 235.483,55.495 235.483,55.129 235.273,54.919 235.273,54.555 235.511,54.318 235.511,53.774 v1(235.077,53.34) ; v1(260.731,58.801) 262.001,57.531 v1(262.001,54.483)
  Signal Layer 2 w0.127: v1(235.077,53.34) 235.17,53.433 241.632,53.433 242.073,53.873 243.383,53.873 244.928,55.419 245.466,55.419 245.474,55.427 246.067,55.427 246.372,55.122 246.981,55.122 247.055,55.049 249.969,55.049 250.438,54.58 251.502,54.58 251.63,54.708 251.786,54.552 252.15,54.552 252.468,54.871 259.846,54.871 260.165,54.551 260.165,54.428 260.619,53.975 261.493,53.975 v1(262.001,54.483)
DCMI_PIXCK: U2.31 U$5.46 | length 27.9
  Top w0.254: U2.31@232.848,63.44 234.109,62.179 v1(236.423,62.179) ; U$5.46@251.104,63.703 251.181,63.627 v1(253.746,63.627)
  Route2 w0.127: v1(253.746,60.96) v1(253.746,63.627)
  Signal Layer 2 w0.127: v1(236.423,62.179) 236.703,62.179 236.874,62.008 236.874,61.794 237.371,61.297 237.519,61.297 237.551,61.265 238.775,61.265 238.909,61.399 242.173,61.399 242.669,60.902 243.223,60.902 243.363,60.762 243.407,60.762 243.417,60.752 244.689,60.752 244.816,60.625 245.324,60.625 245.454,60.496 245.999,60.496 246.209,60.706 253.365,60.706 253.619,60.96 v1(253.746,60.96)
DCMI_VSYNC: U2.93 U$5.21 | length 36.3
  Top w0.127: v1(240.792,52.578) 241.072,52.578 241.372,52.879 241.995,52.879 U2.93@242.818,52.055 242.824,52.061 U2.93@243.45,51.435
  Top w0.254: U$5.21@262.786,58.897 264.51,58.897 v1(264.541,58.928)
  Route2 w0.127: v1(264.541,52.578) v1(264.541,58.928)
  Signal Layer 2 w0.127: v1(240.792,52.578) 241.072,52.578 241.372,52.879 241.861,52.879 242.272,53.289 244.535,53.289 245.055,52.769 245.896,52.769 246.155,53.028 246.308,53.028 246.577,53.298 247.225,53.298 247.288,53.235 247.884,53.235 248.281,52.839 248.644,52.839 248.778,52.706 258.514,52.706 258.538,52.73 258.715,52.73 258.74,52.706 264.413,52.706 v1(264.541,52.578)
GND: C1.2 C2.2 C3.P$2 C4.P$1 C5.2 C6.P$2 C7.1 C8.2 C9.2 C10.2 C11.P$2 C12.P$2 C13.2 C14.P$2 C15.2 C16.2 C17.1 C18.2 C19.2 C20.2 C21.2 C22.2 C23.2 C24.2 C25.2 C26.2 C27.P$2 C28.2 C29.2 C30.2 C31.2 C32.2 C33.P$2 C34.P$2 C35.2 C36.P$2 C3004.P$2 D104.A D108.A J2.3 J2.5 J2.9 J4.GND J5.GND J5.GND1 J5.GND2 J5.GND3 J5.GND4 L103.GND L106.GND LIDAR.1 LIDAR.GND P1.4 P1.GND P2.6 P3.6 P6.4 pad.2 Q1.3 R5.2 R13.1 R18.1 S1.B3 U1.2 U2.10 U2.20 U2.27 U2.45 U2.46 U2.74 U2.99 U8.1 U8.2 U8.3 U8.4 U8.7 U12.8 U12.9 U12.10 U12.11 U12.12 U12.13 U405.11 U405.18 U405.20 U3004.2 U3004.5 U3004.8 U$1.1 U$3.1 U$4.1 U$5.7 U$5.9 U$5.11 U$5.12 U$5.13 U$5.29 U$5.34 U$5.38 U$5.48 X1.2 X1.4 | length 96.3
  Top w0.127: C17.1@224.394,51.435 224.394,50.688 v1(224.79,50.292) 225.357,50.292 S1.B3@226.097,49.552 ; v1(226.568,59.055) 226.626,59.055 U2.46@227.545,58.136 ; C12.P$2@227.711,61.341 228.092,60.96 v1(228.397,60.96) ; U2.45@227.898,58.49 228.829,57.56 v1(228.829,57.455) ; v1(228.092,47.498) C28.2@229.083,47.498 ; R13.1@228.313,77.089 228.391,77.089 v1(228.802,77.499) ; C8.2@229.489,66.167 229.591,66.269 v1(230.327,66.269) ; v1(229.616,63.881) 229.699,63.881 R5.2@230.229,63.351 ; C11.P$2@230.821,46.228 230.821,46.166 231.648,45.339 v1(231.902,45.339) v1@231.964,45.277 ; v1(231.038,72.122) 231.698,72.782 ; D104.A@235.712,68.453 L103.GND@236.576,68.453 ; v1(238.379,45.593) C3004.P$2@238.868,45.593 ; v1(240.64,47.523) 240.731,47.523 U3004.8@240.833,47.422 ; U3004.2@241.483,45.053 v1(241.483,45.791) ; U3004.5@242.799,47.422 v1(243.129,47.422) ; v1(243.713,50.038) 243.848,50.173 R18.1@244.348,50.173 ; P1.GND@244.196,46.623 v1(244.87,46.623) ; U2.99@244.94,54.176 245.776,53.34 245.999,53.34 245.974,53.365 v1(245.872,53.365) ; P1.4@246.151,49.773 246.151,49.251 v1(246.634,48.768) ; v1(246.351,75.692) J5.GND4@247.367,76.708 ; v1(247.817,74.208) J5.GND3@247.817,74.397 ; Q1.3@247.961,52.527 248.088,52.4 v1(248.463,52.4) ; J5.GND3@248.325,73.889 J5.GND@249.017,73.889 ; C16.2@250.911,54.651 250.911,54.95 251.206,55.245 v1(251.206,55.296) ; P1.GND@251.856,46.623 251.87,46.609 v1(252.73,46.609) ; v1(251.968,55.88) 251.991,55.857 U$5.7@252.527,55.857 ; D108.A@253.238,48.26 253.18,48.202 253.18,47.316 253.238,47.259 253.238,47.117 v1(252.73,46.609) ; J5.GND1@253.289,76.708 v1(254,76.708) ; C34.P$2@253.314,46.191 253.148,46.191 v1(252.73,46.609) ; J5.GND2@253.314,74.041 v1(253.873,74.041) ; U$5.9@254.127,55.857 v1(254.127,57.404) ; U$5.11@255.727,55.857 U$5.12@256.54,55.857 ; U$5.38@255.727,67.539 255.727,68.783 v1(255.778,68.834) ; U405.20@256.515,47.625 256.515,47.32 256.616,47.219 U405.18@257.327,47.219 ; v1(256.54,57.277) U$5.12@256.54,55.857 ; C18.2@256.667,53.721 256.667,55.73 U$5.12@256.54,55.857 ; C22.2@257.2,69.748 v1(257.785,69.748) ; U405.18@257.327,47.295 257.622,47.295 257.778,47.451 ; U$5.13@257.346,55.857 U$5.12@256.54,55.857 ; C33.P$2@258.093,45.895 258.242,45.745 C33.P$2@258.267,45.771 ; C33.P$2@258.115,45.917 257.778,46.254 257.778,47.451 ; v1(258.267,47.93) 258.257,47.93 257.778,47.451 ; v1(258.699,75.565) 258.709,75.575 C7.1@259.613,75.575 ; U$5.34@258.946,67.539 258.946,68.827 v1(258.953,68.834) ; C19.2@260.655,69.748 260.68,69.723 v1(261.239,69.723) ; v1(261.62,76.073) 261.671,76.022 U1.2@261.671,74.9 ; U12.8@261.808,45.112 262.034,44.885 262.89,44.885 v1(262.89,44.78) ; U12.13@261.808,48.512 262.531,48.512 ; C25.2@262.509,50.902 262.509,50.038 262.255,49.784 C21.2@261.823,49.784 261.823,49.708 v1(262.533,48.998) 262.533,44.882 ; v1(262.763,69.469) 262.763,69.367 C1.2@263.16,68.971 ; U$5.29@262.786,65.303 264.135,65.303 v1(264.16,65.278) ; v1@262.952,44.842 C27.P$2@263.576,44.842 ; C30.2@263.576,48.362 263.576,48.384 U8.7@264.436,49.245 264.436,49.298 v1(265.176,50.038) ; C13.2@263.703,75.54 263.703,74.879 v1(263.779,74.803) ; C6.P$2@263.855,73.025 264.236,72.644 v1(264.668,72.644) ; v1(266.446,53.975) 266.512,53.975 U8.4@266.909,53.579 267.988,52.499 267.988,52.56 U8.1@268.351,52.197 ; v1(267.056,61.824) C24.2@267.97,61.824 ; v1(267.081,55.626) C23.2@267.97,55.626 ; v1(267.081,58.039) 267.945,58.039 C26.2@267.97,58.064 ; v1(267.081,66.675) 267.945,66.675 C32.2@267.97,66.7 ; C14.P$2@267.869,70.332 267.869,71.475 v1(267.716,71.628) 268.158,72.07 C31.2@268.158,72.228 ; v1(268.021,51.333) 268.071,51.283 268.071,51.334 C29.2@268.478,50.927
  Top w0.254: v1(232.181,67.158) 233.426,67.158 233.299,67.285 C5.2@232.902,66.888 ; U2.74@234.262,46.398 235.108,47.244 v1(235.204,47.244) ; U2.27@234.262,64.854 v1(235.108,64.008) ; v1(237.668,62.484) 237.62,62.484 U2.20@238.576,63.44 ; C15.2@239.303,66.157 239.776,66.63 v1(239.776,66.675) ; C10.2@240.071,65.44 240.071,65.446 v1(240.538,65.913) ; v1(240.69,59.461) 240.931,59.461 241.3,59.093 U2.10@242.111,59.904 ; C4.P$1@242.517,66.292 242.517,66.368 v1(242.824,66.675) ; v1(243.738,61.468) 243.738,61.493 244.131,61.886 X1.2@244.131,62.312 ; X1.4@243.774,65.092 244.348,65.666 v1(244.348,65.786) ; v1(244.602,66.802) 244.929,66.475 C3.P$2@244.929,66.425 ; v1(245.77,60.935) 245.77,61.29 245.643,61.417 C9.2@245.805,61.579 ; C2.2@248.641,62.56 249.098,62.56 249.555,62.103 U$5.48@251.104,62.103 v1(252.349,62.103)
  Signal Layer 2 w0.127: v1(257.785,69.748) v1@257.81,69.723
  Bottom w0.127: v1(246.634,48.768) 246.888,48.768 247.015,48.641 247.015,49.911 J2.5@248.26,49.911 ; J2.5@248.26,50.444 J2.5@248.26,49.911 ; J2.5@248.285,50.444 J2.5@248.285,50.638 ; J2.9@250.516,51.149 250.603,51.149 250.825,50.927 250.825,49.2 250.393,48.768 248.488,48.768 248.26,48.997 J2.5@248.26,49.911
  other v1: 254.356,69.748 229.499,74.378 239.598,74.625
GREEN_LED: R15.2 U2.42 | length 11.4
  Top w0.3: v1(227.889,60.3) 228.261,60.3 228.261,60.248 U2.42@228.959,59.55 ; R15.2@228.079,69.418 228.079,68.923 228.498,68.504 v1(228.498,68.453)
  Route2 w0.3: v1(227.889,60.3) 227.787,60.401 227.787,61.831 228.189,62.233 228.189,66.15 228.889,66.85 228.889,68.062 v1(228.498,68.453)
I2C1_SCL: R3.1 R3002.2 U2.95 | length 28.8
  Top w0.127: R3002.2@234.188,69.342 v1(234.188,69.854) R3.1@234.188,70.366 ; v1(241.554,53.975) 242.313,53.975 U2.95@243.526,52.762
  Route2 w0.127: v1(234.188,69.854) 234.188,69.621 233.705,69.139 233.705,67.821 233.728,67.798 233.728,66.517 233.705,66.495 233.705,63.151 235.708,61.149 235.708,56.111 235.206,55.609 235.206,55.243 234.996,55.033 234.996,53.996 v1(234.467,53.467)
  Signal Layer 2 w0.127: v1(234.467,53.467) 234.584,53.467 234.895,53.779 235.259,53.779 235.316,53.721 241.3,53.721 v1(241.554,53.975)
I2C1_SCL_EXT: LIDAR.3 R3.2 | length 6.2
  Top w0.127: 233.944,77.528 233.944,71.638 R3.2@234.198,71.384
I2C1_SDA: R4.1 R3004.2 U2.96 | length 29.5
  Top w0.127: R3004.2@232.791,69.342 233.299,69.85 233.307,69.85 ; R4.1@232.791,70.366 233.307,69.85 ; v1(233.578,69.85) 233.307,69.85 ; v1(242.189,54.483) 242.512,54.483 U2.96@243.879,53.116
  Route2 w0.127: v1(233.578,69.85) 233.428,69.7 233.428,67.706 233.451,67.683 233.451,66.632 233.428,66.609 233.428,63.036 235.431,61.034 235.431,56.225 234.929,55.724 234.929,55.358 234.061,54.49 v1(234.061,54.254)
  Signal Layer 2 w0.127: v1(234.061,54.254) 234.236,54.254 234.493,53.998 234.723,53.998 234.781,54.056 235.373,54.056 235.431,53.998 240.957,53.998 241.372,54.414 242.12,54.414 v1(242.189,54.483)
I2C1_SDA_EXT: LIDAR.2 R4.2 | length 6.4
  Top w0.127: 232.7,77.528 232.7,71.465 R4.2@232.791,71.374 R4.2@232.948,71.531
I2C2_SCL: R1.2 U2.47 U8.6 U$5.25 | length 56.8
  Top w0.127: v1(261.366,62.103) U$5.25@262.786,62.103 ; v1(263.144,56.134) 264.516,56.134 R1.2@264.947,55.702 ; v1(263.398,49.149) 263.957,49.708 U8.6@263.973,49.708
  Top w0.254: U2.47@227.191,57.783 228.078,56.896 v1(228.092,56.896)
  Route2 w0.127: v1(261.366,62.103) v1(261.366,58.928) 262.382,58.928 263.144,58.166 v1(263.144,56.134) 263.01,56 263.01,49.537 v1(263.398,49.149)
  Signal Layer 2 w0.127: v1(228.092,56.896) 228.421,57.225 228.421,57.243 228.39,57.273 228.39,57.636 228.647,57.893 229.01,57.893 229.267,57.636 229.267,57.617 229.859,57.025 231.26,57.025 231.824,57.589 231.824,57.819 232.863,58.859 233.608,58.859 233.697,58.769 234.195,58.769 234.671,58.293 236.065,58.293 236.214,58.442 237.496,58.442 237.645,58.293 237.843,58.293 238.373,58.823 239.754,58.823 240.665,57.912 244.433,57.912 244.441,57.92 247.757,57.92 248.361,58.524 252.266,58.524 252.428,58.362 260.927,58.362 261.366,58.801 v1(261.366,58.928)